# EAGLE board Rapide2313 (EAGLE 6.0)
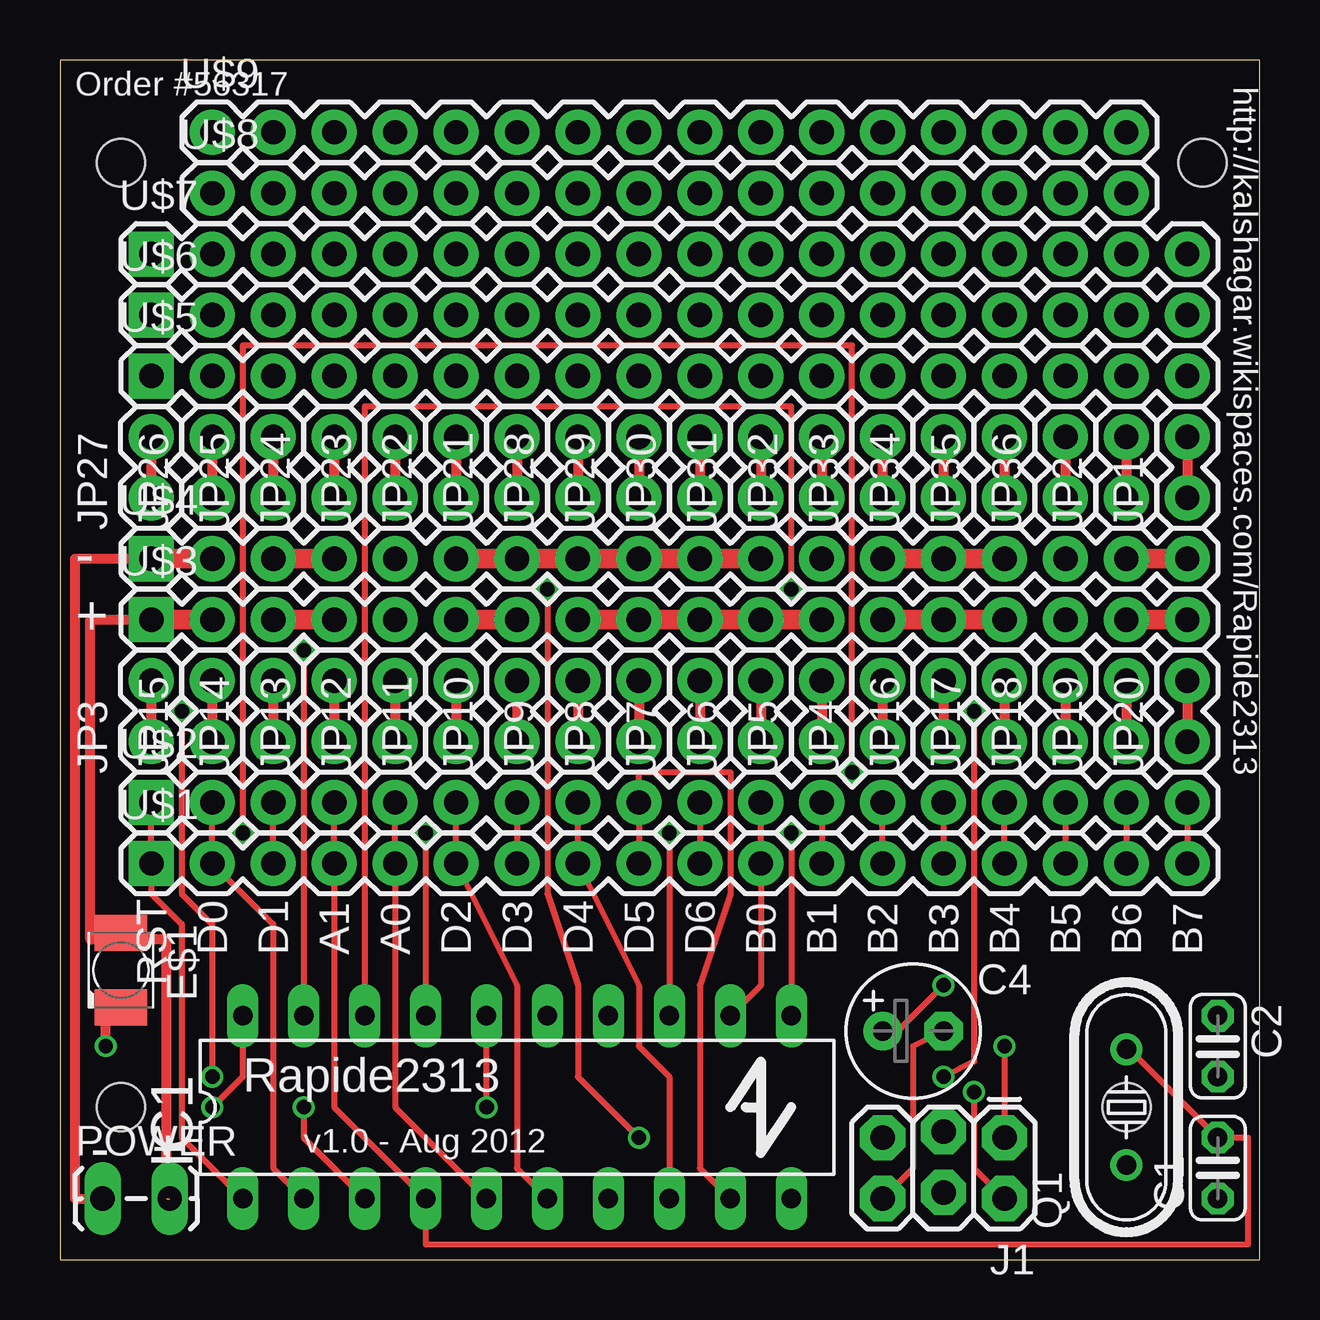
[diagram p0: board, top side]
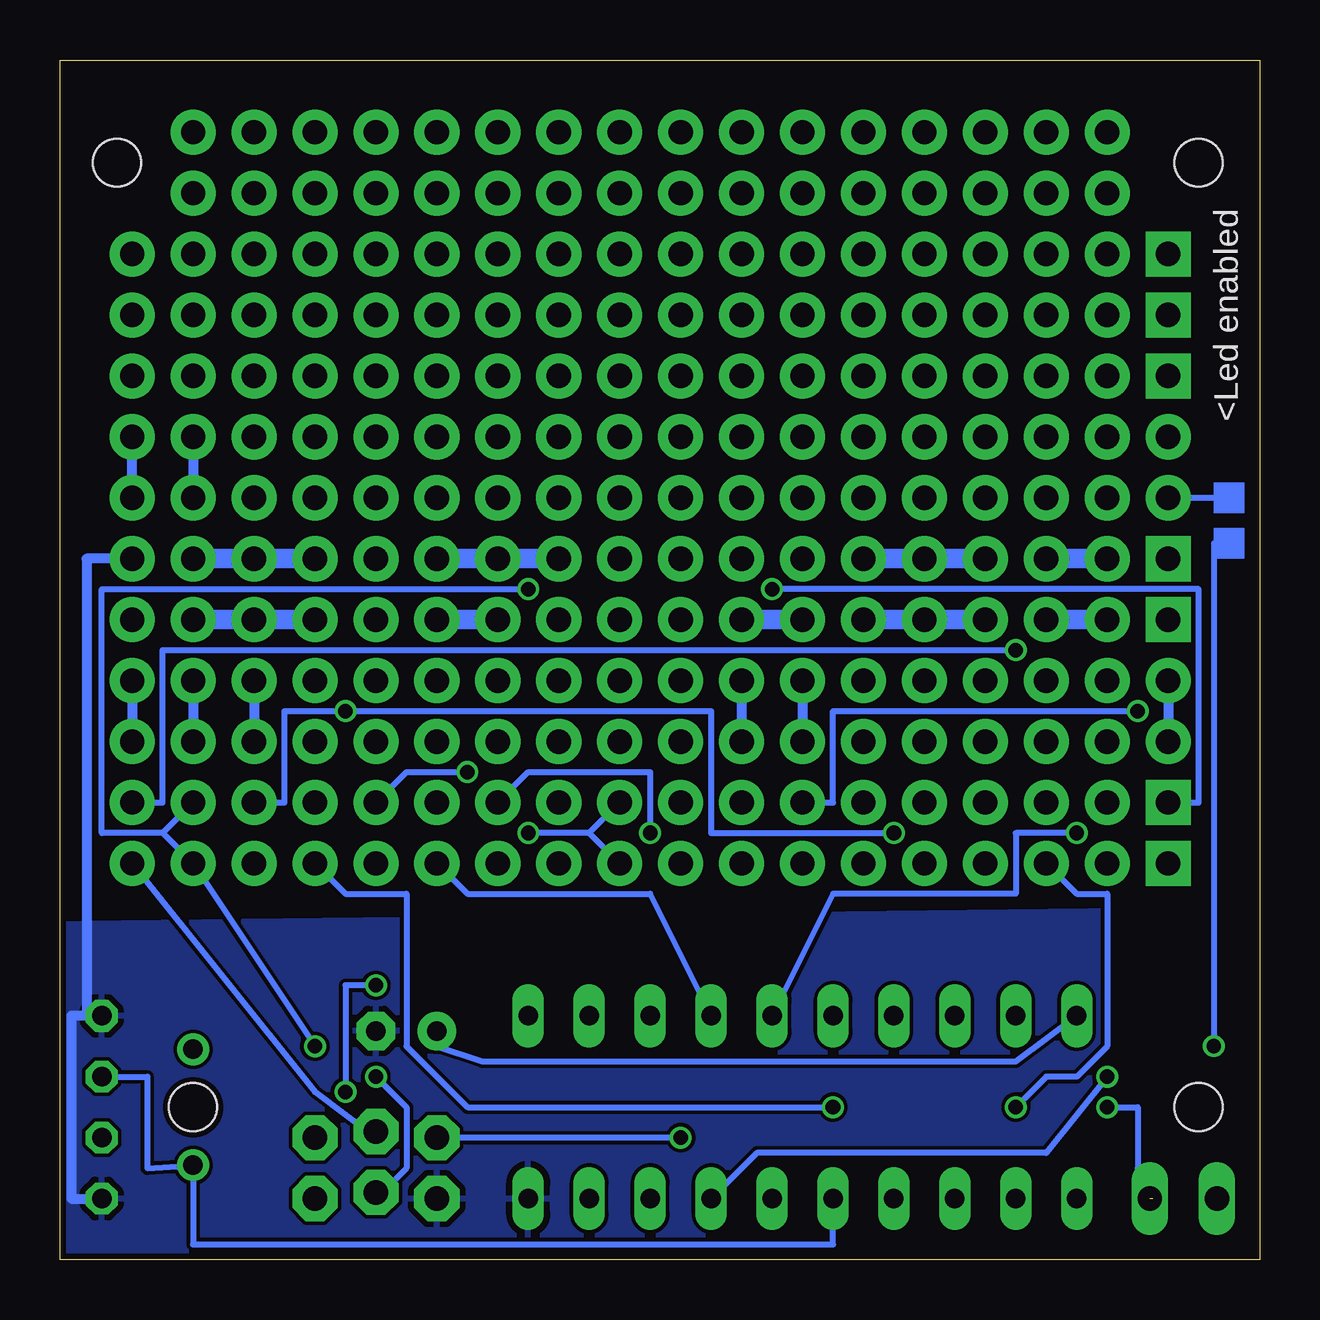
[diagram p1: board, bottom side, seen from below]

Size 50 x 50 mm. Coordinates in mm from the lower left corner, seen from the top.
Outline: 0,0 50,0 50,50 0,50 0,0
Copper layers (1*16): Top 0.035mm / dielectric 1.5mm / Bottom 0.035mm
Design rules: minimum track width 6mil, minimum drill 12mil, track to track 6mil, track to pad 6mil, pad to pad 6mil, via to via 6mil, smd to smd 0mil, copper to edge 10mil, drill to drill 10mil, minimum pad ring 10mil, minimum via ring 6mil, stop-mask expansion 2mil, vias tented up to drill 100mil, thermal gap 10mil
Holes 2 mm at 2.54,6.35 44.45,6.35 2.54,45.72 47.62,45.72

## Footprints (pad centres in the part's own frame; a part is rotated, then mirrored left to right if it is on the bottom)
C025-024X044 = drill 0.813 octagon: 1 -1.27,0; 2 1.27,0
E2,5-6 = drill 0.813 pad 1.6: + -1.27,0 | drill 0.813 pad 1.6 octagon: - 1.27,0
KA-3528ASYC = smd 1.5 x 2.2: A -1.55,0; C 1.55,0
DIL20 = drill 0.813 long: 1 -11.43,-3.81; 2 -8.89,-3.81; 3 -6.35,-3.81; 4 -3.81,-3.81; 5 -1.27,-3.81; 6 1.27,-3.81; 7 3.81,-3.81; 8 6.35,-3.81; 9 8.89,-3.81; 10 11.43,-3.81; 11 11.43,3.81; 12 8.89,3.81; 13 6.35,3.81; 14 3.81,3.81; 15 1.27,3.81; 16 -1.27,3.81; 17 -3.81,3.81; 18 -6.35,3.81; 19 -8.89,3.81; 20 -11.43,3.81
2X3_LOCK = drill 1.016 pad 1.88 octagon: 1 0,0; 2 0,2.54; 3 2.54,-0.254; 4 2.54,2.286; 5 5.08,0; 6 5.08,2.54
1X02 = drill 1.016 pad 1.88: 1 0,0; 2 2.54,0
1X02_LOCK_LONGPADS = drill 1.016 long: 1 -0.127,0; 2 2.667,0
HC49/S = drill 0.813: 1 -2.413,0; 2 2.413,0
1X18 = drill 1.016 pad 1.88 square: 1 0,0 | drill 1.016 pad 1.88: 2 2.54,0; 3 5.08,0; 4 7.62,0; 5 10.16,0; 6 12.7,0; 7 15.24,0; 8 17.78,0; 9 20.32,0; 10 22.86,0; 11 25.4,0; 12 27.94,0; 13 30.48,0; 14 33.02,0; 15 35.56,0; 16 38.1,0; 17 40.64,0; 18 43.18,0
1X16 = drill 1.016 pad 1.88: 1 0,0; 2 2.54,0; 3 5.08,0; 4 7.62,0; 5 10.16,0; 6 12.7,0; 7 15.24,0; 8 17.78,0; 9 20.32,0; 10 22.86,0; 11 25.4,0; 12 27.94,0; 13 30.48,0; 14 33.02,0; 15 35.56,0; 16 38.1,0

## Placement (x,y rotation side)
C1  22pF  [C025-024X044]  48.26,3.81 90 top
C2  22pF  [C025-024X044]  48.26,8.89 270 top
C4  [E2,5-6]  35.56,9.53 0 top
E$1  [KA-3528ASYC]  2.54,12.06 270 top
IC1  AT90S2313P  [DIL20]  19.05,6.35 0 top
J1  AVR_SPI_PRG_62X3_LOCK  [2X3_LOCK]  39.37,5.08 180 top
JP1  [1X02]  46.99,31.75 90 top
JP2  [1X02]  44.45,31.75 90 top
JP3  [1X02]  3.81,21.59 90 top
JP4  [1X02]  34.29,21.59 90 top
JP5  [1X02]  31.75,21.59 90 top
JP6  [1X02]  29.21,21.59 90 top
JP7  [1X02]  26.67,21.59 90 top
JP8  [1X02]  24.13,21.59 90 top
JP9  [1X02]  21.59,21.59 90 top
JP10  [1X02]  19.05,21.59 90 top
JP11  [1X02]  16.51,21.59 90 top
JP12  [1X02]  13.97,21.59 90 top
JP13  [1X02]  11.43,21.59 90 top
JP14  [1X02]  8.89,21.59 90 top
JP15  [1X02]  6.35,21.59 90 top
JP16  [1X02]  36.83,21.59 90 top
JP17  [1X02]  39.37,21.59 90 top
JP18  [1X02]  41.91,21.59 90 top
JP19  [1X02]  44.45,21.59 90 top
JP20  [1X02]  46.99,21.59 90 top
JP21  [1X02]  19.05,31.75 90 top
JP22  [1X02]  16.51,31.75 90 top
JP23  [1X02]  13.97,31.75 90 top
JP24  [1X02]  11.43,31.75 90 top
JP25  [1X02]  8.89,31.75 90 top
JP26  [1X02]  6.35,31.75 90 top
JP27  [1X02]  3.81,31.75 90 top
JP28  [1X02]  21.59,31.75 90 top
JP29  [1X02]  24.13,31.75 90 top
JP30  [1X02]  26.67,31.75 90 top
JP31  [1X02]  29.21,31.75 90 top
JP32  [1X02]  31.75,31.75 90 top
JP33  [1X02]  34.29,31.75 90 top
JP34  [1X02]  36.83,31.75 90 top
JP35  [1X02]  39.37,31.75 90 top
JP36  [1X02]  41.91,31.75 90 top
POWER  [1X02_LOCK_LONGPADS]  1.91,2.54 0 top
Q1  [HC49/S]  44.45,6.35 90 top
U$1  M18_  [1X18]  3.81,16.51 0 top
U$2  M18_  [1X18]  3.81,19.05 0 top
U$3  M18_  [1X18]  3.81,26.67 0 top
U$4  M18_  [1X18]  3.81,29.21 0 top
U$5  M18_  [1X18]  3.81,36.83 0 top
U$6  M18_  [1X18]  3.81,39.37 0 top
U$7  M18_  [1X18]  3.81,41.91 0 top
U$8  M18_  [1X16]  6.35,44.45 0 top
U$9  M18_  [1X16]  6.35,46.99 0 top

## Library data of the parts
C1 C2 C4 = resistor
E$1 = led
IC1 = atmel; OC_FARNELL: unknown; OC_NEWARK: unknown
J1 JP1-JP36 POWER U$1-U$9 = SparkFun
Q1 = crystal; OC_FARNELL: 1667008; OC_NEWARK: unknown

## Nets
GND: C1.1 C2.1 C4.- IC1.10 J1.6 U$4.1 U$4.2 U$4.3 U$4.4 U$4.5 U$4.6 U$4.11 U$4.12 U$4.13 U$4.15 U$4.16 U$4.17 U$4.18
MISO: IC1.18 J1.1 U$1.17 U$2.17
MOSI: IC1.17 J1.4 U$1.16 U$2.16
N$1: C1.2 IC1.4 Q1.2 U$1.4 U$2.4
N$2: C2.2 IC1.5 Q1.1 U$1.5 U$2.5
N$3: IC1.2 U$1.2 U$2.2
N$4: IC1.3 U$1.3 U$2.3
N$5: IC1.6 U$1.6 U$2.6
N$6: IC1.7 U$1.7 U$2.7
N$7: IC1.8 U$1.8 U$2.8
N$8: IC1.9 U$1.9 U$2.9
N$9: IC1.11 U$1.10 U$2.10
N$10: IC1.12 U$1.11 U$2.11
N$11: IC1.13 U$1.12 U$2.12
N$12: IC1.14 U$1.13 U$2.13
N$13: IC1.15 U$1.14 U$2.14
N$14: IC1.16 U$1.15 U$2.15
RESET: IC1.1 J1.5 U$1.1 U$2.1
S$1: JP27.1 JP27.2
S$2: JP24.1 JP24.2
S$4: JP23.1 JP23.2
S$5: JP22.1 JP22.2
S$6: JP21.1 JP21.2
S$7: JP28.1 JP28.2
S$8: JP29.1 JP29.2
S$9: JP30.1 JP30.2
S$10: JP31.1 JP31.2
S$11: JP32.1 JP32.2
S$12: JP3.1 JP3.2
S$13: JP10.1 JP10.2
S$14: JP9.1 JP9.2
S$15: JP18.1 JP18.2
S$16: JP19.1 JP19.2
S$17: JP20.1 JP20.2
S$18: JP1.1 JP1.2
S$19: JP2.1 JP2.2
S$20: POWER.1
S$21: JP26.1 JP26.2
S$22: JP25.1 JP25.2
S$23: JP33.1 JP33.2
S$24: JP34.1 JP34.2
S$25: JP35.1 JP35.2
S$26: JP36.1 JP36.2
S$27: JP17.1 JP17.2
S$28: JP16.1 JP16.2
S$29: JP4.1 JP4.2
S$30: JP5.1 JP5.2
S$31: JP6.1 JP6.2
S$32: JP7.1 JP7.2
S$33: JP8.1 JP8.2
S$34: JP11.1 JP11.2
S$35: JP12.1 JP12.2
S$36: JP13.1 JP13.2
S$37: JP14.1 JP14.2
S$38: JP15.1 JP15.2
SCK: IC1.19 J1.3 U$1.18 U$2.18
VCC: C4.+ IC1.20 J1.2 POWER.2 U$3.1 U$3.2 U$3.3 U$3.4 U$3.5 U$3.6 U$3.7 U$3.8 U$3.12 U$3.13 U$3.15 U$3.16 U$3.17 U$3.18

## Tracks (layer width: path | path; a pad name or v marks a point on that pad's centre or on a via)
GND
  Top 0.254: 36.83,10.16 C4.- 35.56,8.89 35.56,3.81 J1.6
  Top 0.406: U$4.1 0.64,29.21 0.64,2.54 1.91,2.54
  Top 0.813: U$4.1 U$4.2 | U$4.3 U$4.4 | U$4.6 U$4.11 | U$4.13 U$4.15 | U$4.17 U$4.18
  Bottom 0.406: U$4.18 48.9,29.21 48.9,10.16 C2.1 49.53,10.16 49.53,2.54 C1.1
  Bottom 0.813: U$4.2 U$4.3 | U$4.4 U$4.5 U$4.6 | U$4.11 U$4.12 U$4.13 | U$4.15 U$4.16 U$4.17
  pour Bottom: -1.27,14.61 50.8,13.97 50.8,-0.64 -0.64,-0.64
MISO  (via drill 0.61)
  Top 0.254: IC1.18 12.7,35.56 30.48,35.56 v30.48,27.94 | v39.37,8.89 J1.1 | U$2.17 U$1.17
  Bottom 0.254: v30.48,27.94 48.26,27.94 48.26,17.78 45.72,17.78 | 45.72,17.78 U$1.17 v39.37,8.89 | 45.72,17.78 U$2.17
MOSI  (via drill 0.61)
  Top 0.254: v15.24,17.78 IC1.17 | v36.83,7.62 38.1,8.26 v38.1,22.86 | U$2.16 U$1.16
  Bottom 0.254: v15.24,17.78 22.86,17.78 22.86,22.86 v38.1,22.86 40.64,22.86 40.64,19.05 U$2.16 | v36.83,7.62 35.56,6.35 35.56,3.81 36.83,2.54 J1.4
N$1
  Top 0.254: U$2.4 U$1.4 11.43,6.35 IC1.4 15.24,0.64 49.53,0.64 49.53,5.08 C1.2 44.45,8.89 Q1.2
N$2
  Top 0.254: IC1.5 13.97,6.35 U$1.5 U$2.5 | 44.45,3.81 Q1.1
  Bottom 0.254: C2.2 46.35,7.62 46.35,3.81 Q1.1 44.45,0.64 17.78,0.64 IC1.5
N$3
  Top 0.254: IC1.2 8.89,3.81 8.89,13.97 U$1.2 U$2.2
N$4  (via drill 0.61)
  Top 0.254: IC1.3 10.16,5.08 v10.16,6.35 | U$1.3 U$2.3
  Bottom 0.254: v10.16,6.35 8.89,7.62 7.62,7.62 6.35,8.89 6.35,15.24 7.62,15.24 U$1.3
N$5
  Top 0.254: IC1.6 19.05,3.81 19.05,11.43 U$1.6 U$2.6
N$6  (via drill 0.61)
  Top 0.254: v6.35,7.62 6.35,13.97 5.08,15.24 v5.08,22.86 | U$2.7 U$1.7
  Bottom 0.254: IC1.7 20.95,4.45 8.89,4.45 v6.35,7.62 | v5.08,22.86 17.78,22.86 17.78,19.05 U$2.7
N$7
  Top 0.254: IC1.8 25.4,7.62 24.13,8.89 24.13,11.43 U$1.8 U$2.8
N$8
  Top 0.254: IC1.9 26.67,3.81 26.67,11.43 27.94,15.24 27.94,20.32 24.13,20.32 U$2.9 U$1.9
N$9  (via drill 0.61)
  Top 0.254: v30.48,17.78 IC1.11 | U$2.10 U$1.10
  Bottom 0.254: 27.94,17.78 v30.48,17.78 | U$2.10 27.94,17.78 | 27.94,17.78 U$1.10
N$10
  Top 0.254: IC1.12 29.21,11.43 U$1.11 U$2.11
N$11  (via drill 0.61)
  Top 0.254: v25.4,17.78 IC1.13 | U$2.12 U$1.12
  Bottom 0.254: v25.4,17.78 25.4,20.32 30.48,20.32 U$2.12
N$12
  Top 0.254: U$1.13 U$2.13
  Bottom 0.254: IC1.14 25.4,15.24 33.02,15.24 U$1.13
N$13  (via drill 0.61)
  Top 0.254: v7.62,17.78 7.62,38.1 33.02,38.1 v33.02,20.32 | U$2.14 U$1.14
  Bottom 0.254: IC1.15 17.78,15.24 10.16,15.24 10.16,17.78 v7.62,17.78 | v33.02,20.32 35.56,20.32 U$2.14
N$14  (via drill 0.61)
  Top 0.254: v17.78,6.35 IC1.16 | U$1.15 U$2.15
  Bottom 0.254: v17.78,6.35 33.02,6.35 35.56,8.89 35.56,15.24 38.1,15.24 U$1.15
RESET  (via drill 0.61)
  Top 0.254: IC1.1 5.08,5.08 5.08,13.97 3.81,15.24 U$1.1 U$2.1 | v24.13,5.08 21.59,7.62 21.59,11.43 20.32,15.24 v20.32,27.94
  Bottom 0.254: v24.13,5.08 J1.5 | v20.32,27.94 2.54,27.94 2.54,19.05 U$2.1
S$1
  Top 0.406: JP27.2 JP27.1
  Bottom 0.254: 1.91,31.75 JP27.1
S$2
  Top 0.406: JP24.2 JP24.1
S$3  (via drill 0.6)
  Top 0.406: v1.91,8.89 1.91,10.79
  Bottom 0.254: 1.91,29.84 v1.91,8.89
S$4
  Top 0.406: JP23.2 JP23.1
S$5
  Top 0.406: JP22.2 JP22.1
S$6
  Top 0.406: JP21.2 JP21.1
S$7
  Top 0.406: JP28.2 JP28.1
S$8
  Top 0.406: JP29.2 JP29.1
S$9
  Top 0.406: JP30.2 JP30.1
S$10
  Top 0.406: JP31.2 JP31.1
S$11
  Top 0.406: JP32.2 JP32.1
S$12
  Top 0.406: JP3.2 JP3.1
  Bottom 0.406: JP3.2 JP3.1
S$13
  Top 0.406: JP10.2 JP10.1
  Bottom 0.406: JP10.2 JP10.1
S$14
  Top 0.406: JP9.2 JP9.1
  Bottom 0.406: JP9.2 JP9.1
S$15
  Top 0.406: JP18.2 JP18.1
  Bottom 0.406: JP18.2 JP18.1
S$16
  Top 0.406: JP19.2 JP19.1
  Bottom 0.406: JP19.2 JP19.1
S$17
  Top 0.406: JP20.2 JP20.1
  Bottom 0.406: JP20.2 JP20.1
S$18
  Top 0.406: JP1.2 JP1.1
  Bottom 0.406: JP1.1 JP1.2
S$19
  Top 0.406: JP2.2 JP2.1
  Bottom 0.406: JP2.2 JP2.1
S$21
  Top 0.406: JP26.2 JP26.1
S$22
  Top 0.406: JP25.2 JP25.1
S$23
  Top 0.406: JP33.2 JP33.1
S$24
  Top 0.406: JP34.2 JP34.1
S$25
  Top 0.406: JP35.2 JP35.1
S$26
  Top 0.406: JP36.2 JP36.1
S$27
  Top 0.406: JP17.2 JP17.1
S$28
  Top 0.406: JP16.2 JP16.1
S$29
  Top 0.406: JP4.2 JP4.1
S$30
  Top 0.406: JP5.2 JP5.1
S$31
  Top 0.406: JP6.2 JP6.1
S$32
  Top 0.406: JP7.2 JP7.1
S$33
  Top 0.406: JP8.2 JP8.1
S$34
  Top 0.406: JP11.2 JP11.1
S$35
  Top 0.406: JP12.2 JP12.1
S$36
  Top 0.406: JP13.2 JP13.1
S$37
  Top 0.406: JP14.2 JP14.1
S$38
  Top 0.406: JP15.2 JP15.1
SCK  (via drill 0.61)
  Top 0.254: v10.16,25.4 IC1.19 | U$2.18 U$1.18
  Bottom 0.254: U$1.18 39.37,6.99 36.83,5.08 J1.3 | v10.16,25.4 45.72,25.4 45.72,19.05 U$2.18
VCC  (via drill 0.61)  (1 unrouted)
  Top 0.254: v6.35,6.35 7.62,7.62 IC1.20 | J1.2 38.1,3.81 v38.1,6.99 | v36.83,11.43 34.29,8.89 C4.+
  Top 0.406: 4.45,2.54 4.45,13.34 1.27,13.34 1.27,26.67 U$3.1
  Top 0.813: U$3.1 U$3.2 | U$3.3 U$3.4 | U$3.6 U$3.7 | U$3.8 U$3.12 | U$3.13 U$3.15 | U$3.17 U$3.18
  Bottom 0.254: IC1.20 10.16,8.26 32.38,8.26 34.29,8.89 C4.+ | v6.35,6.35 5.08,6.35 5.08,3.81 POWER.2 | v38.1,6.99 38.1,11.43 v36.83,11.43
  Bottom 0.813: U$3.2 U$3.3 | U$3.4 U$3.5 U$3.6 | U$3.7 U$3.8 | U$3.12 U$3.13 | U$3.15 U$3.16 U$3.17
(copper drawn outside any net)
  shapes: Bottom area x2

## Text on the board
bNames: <Led enabled
_tNames: http://kalshagar.wikispaces.com/Rapide2313 | Order #56317 | - | + | D0 | D1 | A1 | A0 | D2 | D3 | D4 | D5 | D6 | B0 | B1 | B2 | B3 | B4 | B5 | B6 | B7 | RST | Rapide2313 | - | + | v1.0 - Aug 2012